# EAGLE board VgaCrystalDiode_production (EAGLE 5.10)
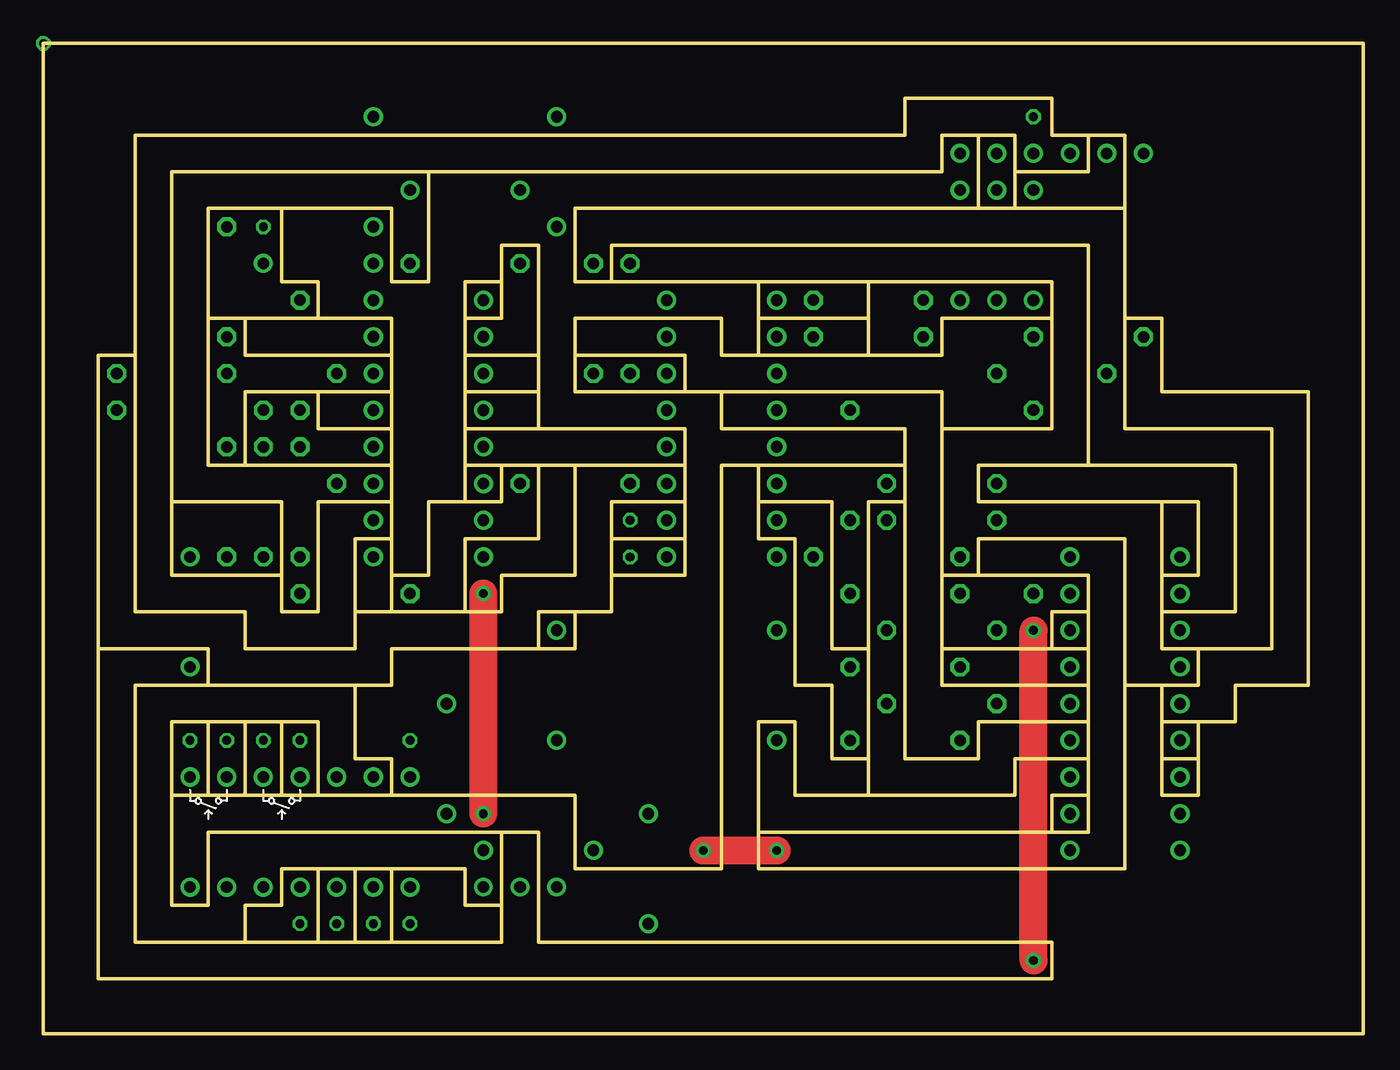
[diagram p0: board, top side]
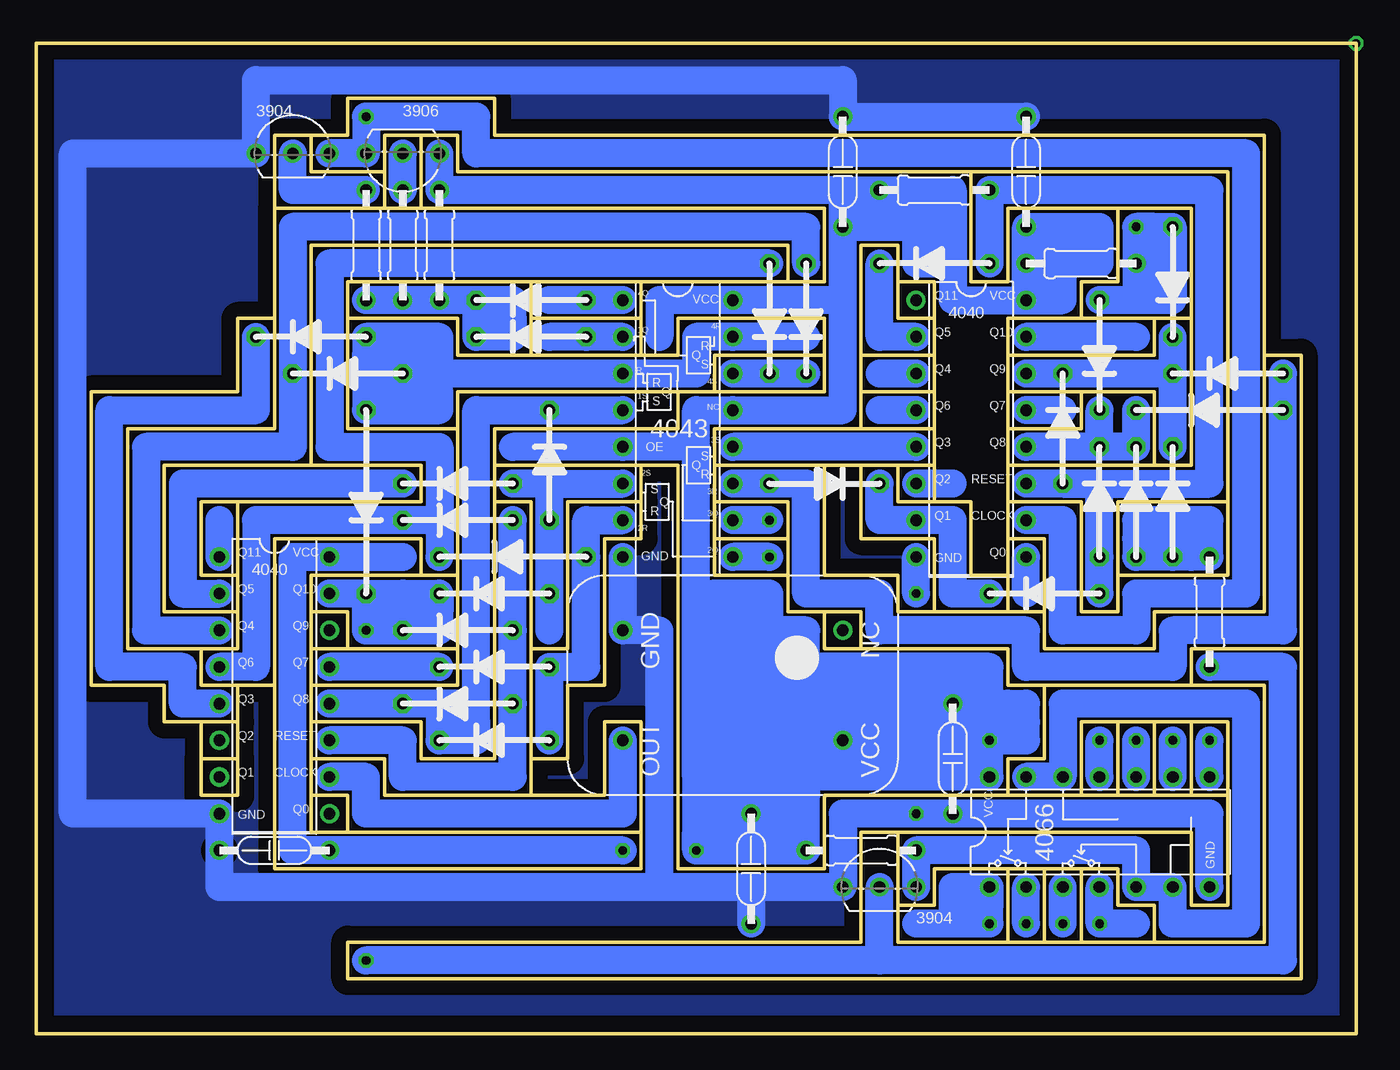
[diagram p1: board, bottom side, seen from below]

Size 91.44 x 68.58 mm. Coordinates in mm from the lower left corner, seen from the top.
Outline: 31.75,13.97 34.29,13.97 34.29,6.35 69.85,6.35 69.85,3.81 3.81,3.81 3.81,26.67
Outline: 31.75,13.97 31.75,8.89
Outline: 31.75,8.89 31.75,6.35 24.13,6.35
Outline: 24.13,6.35 21.59,6.35
Outline: 21.59,6.35 19.05,6.35
Outline: 19.05,6.35 13.97,6.35
Outline: 13.97,6.35 6.35,6.35 6.35,24.13 11.43,24.13
Outline: 11.43,24.13 11.43,26.67 3.81,26.67
Outline: 31.75,13.97 11.43,13.97 11.43,8.89 8.89,8.89 8.89,16.51
Outline: 8.89,16.51 8.89,21.59 11.43,21.59
Outline: 11.43,21.59 13.97,21.59
Outline: 13.97,21.59 16.51,21.59
Outline: 16.51,21.59 19.05,21.59 19.05,16.51
Outline: 19.05,16.51 24.13,16.51
Outline: 24.13,16.51 24.13,19.05 21.59,19.05 21.59,24.13
Outline: 21.59,24.13 11.43,24.13
Outline: 8.89,16.51 11.43,16.51
Outline: 11.43,16.51 13.97,16.51
Outline: 13.97,16.51 16.51,16.51
Outline: 16.51,16.51 19.05,16.51
Outline: 16.51,16.51 16.51,21.59
Outline: 13.97,21.59 13.97,16.51
Outline: 11.43,16.51 11.43,21.59
Outline: 13.97,6.35 13.97,8.89 16.51,8.89 16.51,11.43 19.05,11.43
Outline: 19.05,11.43 19.05,6.35
Outline: 19.05,11.43 21.59,11.43
Outline: 21.59,11.43 21.59,6.35
Outline: 21.59,11.43 24.13,11.43
Outline: 24.13,11.43 24.13,6.35
Outline: 24.13,11.43 29.21,11.43 29.21,8.89 31.75,8.89
Outline: 24.13,16.51 36.83,16.51 36.83,11.43 46.99,11.43 46.99,39.37 49.53,39.37
Outline: 49.53,39.37 59.69,39.37
Outline: 59.69,39.37 59.69,41.91 46.99,41.91 46.99,44.45
Outline: 46.99,44.45 44.45,44.45
Outline: 44.45,44.45 36.83,44.45 36.83,46.99
Outline: 36.83,46.99 44.45,46.99 44.45,44.45
Outline: 36.83,46.99 36.83,49.53 46.99,49.53 46.99,46.99 49.53,46.99
Outline: 49.53,46.99 49.53,49.53
Outline: 49.53,49.53 49.53,52.07
Outline: 49.53,52.07 39.37,52.07
Outline: 39.37,52.07 36.83,52.07 36.83,57.15 64.77,57.15
Outline: 64.77,57.15 64.77,62.23
Outline: 64.77,62.23 62.23,62.23 62.23,59.69 26.67,59.69
Outline: 26.67,59.69 26.67,52.07 24.13,52.07 24.13,57.15 16.51,57.15
Outline: 16.51,57.15 16.51,52.07 19.05,52.07 19.05,49.53
Outline: 19.05,49.53 24.13,49.53 24.13,46.99
Outline: 29.21,49.53 29.21,52.07 31.75,52.07
Outline: 31.75,52.07 31.75,54.61 34.29,54.61 34.29,46.99
Outline: 34.29,46.99 29.21,46.99
Outline: 29.21,46.99 29.21,49.53
Outline: 29.21,49.53 31.75,49.53 31.75,52.07
Outline: 29.21,46.99 29.21,44.45
Outline: 29.21,44.45 34.29,44.45
Outline: 34.29,44.45 34.29,46.99
Outline: 34.29,44.45 34.29,41.91
Outline: 34.29,41.91 29.21,41.91
Outline: 29.21,41.91 29.21,44.45
Outline: 34.29,41.91 44.45,41.91 44.45,39.37
Outline: 34.29,39.37 31.75,39.37
Outline: 31.75,39.37 29.21,39.37
Outline: 29.21,39.37 29.21,41.91
Outline: 29.21,39.37 29.21,36.83
Outline: 29.21,36.83 31.75,36.83 31.75,39.37
Outline: 34.29,39.37 34.29,34.29 29.21,34.29 29.21,29.21
Outline: 29.21,29.21 24.13,29.21
Outline: 24.13,29.21 24.13,31.75
Outline: 24.13,31.75 26.67,31.75 26.67,36.83 29.21,36.83
Outline: 24.13,29.21 21.59,29.21
Outline: 21.59,29.21 21.59,34.29 24.13,34.29
Outline: 24.13,34.29 24.13,31.75
Outline: 24.13,34.29 24.13,36.83
Outline: 24.13,36.83 19.05,36.83 19.05,29.21 16.51,29.21 16.51,31.75
Outline: 16.51,31.75 16.51,36.83 8.89,36.83
Outline: 8.89,36.83 8.89,31.75 16.51,31.75
Outline: 21.59,29.21 21.59,26.67 13.97,26.67 13.97,29.21 6.35,29.21 6.35,46.99
Outline: 6.35,46.99 3.81,46.99 3.81,26.67
Outline: 8.89,36.83 8.89,59.69 26.67,59.69
Outline: 16.51,57.15 11.43,57.15 11.43,49.53
Outline: 11.43,49.53 13.97,49.53
Outline: 13.97,49.53 19.05,49.53
Outline: 13.97,49.53 13.97,46.99 24.13,46.99
Outline: 24.13,46.99 24.13,44.45
Outline: 24.13,44.45 19.05,44.45
Outline: 19.05,44.45 13.97,44.45 13.97,39.37
Outline: 13.97,39.37 11.43,39.37 11.43,49.53
Outline: 13.97,39.37 24.13,39.37
Outline: 24.13,39.37 24.13,41.91
Outline: 24.13,41.91 19.05,41.91 19.05,44.45
Outline: 24.13,41.91 24.13,44.45
Outline: 24.13,36.83 24.13,39.37
Outline: 29.21,29.21 31.75,29.21 31.75,31.75 36.83,31.75 36.83,39.37
Outline: 34.29,26.67 24.13,26.67 24.13,24.13 21.59,24.13
Outline: 34.29,26.67 34.29,29.21 36.83,29.21
Outline: 36.83,29.21 39.37,29.21 39.37,31.75
Outline: 39.37,31.75 39.37,34.29
Outline: 39.37,34.29 39.37,36.83 44.45,36.83
Outline: 44.45,36.83 44.45,39.37
Outline: 44.45,39.37 36.83,39.37
Outline: 36.83,39.37 34.29,39.37
Outline: 49.53,13.97 49.53,11.43 74.93,11.43 74.93,24.13
Outline: 49.53,13.97 69.85,13.97
Outline: 69.85,13.97 72.39,13.97 72.39,16.51
Outline: 72.39,16.51 69.85,16.51 69.85,13.97
Outline: 72.39,16.51 72.39,19.05
Outline: 72.39,19.05 67.31,19.05 67.31,16.51 57.15,16.51
Outline: 57.15,16.51 52.07,16.51 52.07,21.59 49.53,21.59 49.53,13.97
Outline: 72.39,19.05 72.39,21.59
Outline: 72.39,21.59 64.77,21.59 64.77,19.05 59.69,19.05 59.69,36.83
Outline: 59.69,36.83 57.15,36.83 57.15,26.67
Outline: 57.15,26.67 57.15,19.05
Outline: 57.15,19.05 57.15,16.51
Outline: 57.15,19.05 54.61,19.05 54.61,24.13 52.07,24.13 52.07,34.29 49.53,34.29 49.53,36.83
Outline: 49.53,36.83 54.61,36.83 54.61,26.67 57.15,26.67
Outline: 49.53,36.83 49.53,39.37
Outline: 46.99,44.45 62.23,44.45 62.23,41.91
Outline: 62.23,41.91 62.23,31.75
Outline: 62.23,31.75 62.23,26.67
Outline: 62.23,26.67 62.23,24.13 72.39,24.13
Outline: 72.39,24.13 72.39,21.59
Outline: 72.39,24.13 72.39,26.67
Outline: 72.39,26.67 69.85,26.67
Outline: 69.85,26.67 62.23,26.67
Outline: 72.39,26.67 72.39,29.21
Outline: 72.39,29.21 69.85,29.21 69.85,26.67
Outline: 72.39,29.21 72.39,31.75 64.77,31.75
Outline: 64.77,31.75 62.23,31.75
Outline: 64.77,31.75 64.77,34.29 74.93,34.29 74.93,24.13
Outline: 80.01,19.05 80.01,16.51 77.47,16.51 77.47,19.05
Outline: 80.01,19.05 77.47,19.05
Outline: 77.47,19.05 77.47,21.59
Outline: 77.47,21.59 80.01,21.59
Outline: 80.01,21.59 80.01,19.05
Outline: 77.47,21.59 77.47,24.13
Outline: 77.47,24.13 80.01,24.13 80.01,26.67
Outline: 80.01,26.67 85.09,26.67 85.09,41.91 74.93,41.91 74.93,49.53
Outline: 74.93,49.53 77.47,49.53 77.47,44.45 87.63,44.45 87.63,24.13 82.55,24.13 82.55,21.59 80.01,21.59
Outline: 80.01,26.67 77.47,26.67 77.47,29.21
Outline: 77.47,29.21 82.55,29.21 82.55,39.37 72.39,39.37
Outline: 72.39,39.37 72.39,54.61 39.37,54.61 39.37,52.07
Outline: 49.53,52.07 57.15,52.07
Outline: 57.15,52.07 57.15,49.53
Outline: 57.15,49.53 49.53,49.53
Outline: 57.15,49.53 57.15,46.99
Outline: 57.15,46.99 49.53,46.99
Outline: 57.15,46.99 62.23,46.99 62.23,49.53 69.85,49.53
Outline: 69.85,49.53 69.85,52.07 57.15,52.07
Outline: 62.23,41.91 69.85,41.91 69.85,49.53
Outline: 77.47,29.21 77.47,31.75
Outline: 77.47,31.75 77.47,36.83
Outline: 77.47,36.83 80.01,36.83 80.01,31.75 77.47,31.75
Outline: 77.47,36.83 64.77,36.83 64.77,39.37 72.39,39.37
Outline: 74.93,49.53 74.93,57.15
Outline: 74.93,57.15 67.31,57.15
Outline: 67.31,57.15 64.77,57.15
Outline: 64.77,62.23 67.31,62.23 67.31,59.69
Outline: 67.31,59.69 67.31,57.15
Outline: 67.31,59.69 72.39,59.69 72.39,62.23
Outline: 72.39,62.23 74.93,62.23 74.93,57.15
Outline: 72.39,62.23 69.85,62.23 69.85,64.77 59.69,64.77 59.69,62.23 6.35,62.23 6.35,46.99
Outline: 34.29,26.67 36.83,26.67 36.83,29.21
Outline: 77.47,24.13 74.93,24.13
Outline: 39.37,31.75 44.45,31.75 44.45,34.29
Outline: 39.37,34.29 44.45,34.29
Outline: 44.45,34.29 44.45,36.83
Outline: 59.69,36.83 59.69,39.37
Outline: 0,0 0,68.58 91.44,68.58 91.44,0 0,0
Copper layers (1*16): Top 0.035mm / dielectric 1.5mm / Bottom 0.035mm
Design rules "default": minimum track width 10mil, minimum drill 24mil, track to track 8mil, track to pad 8mil, pad to pad 8mil, via to via 8mil, smd to smd 8mil, copper to edge 40mil, drill to drill 8mil, minimum pad ring 10mil, minimum via ring 8mil, stop-mask expansion 4mil, vias tented up to drill 0mil, thermal gap 10mil

## Footprints (pad centres in the part's own frame; a part is rotated, then mirrored left to right if it is on the bottom)
4043-SR-LATCH = drill 0.813 round: 1!R -3.81,1.27; 1!S -3.81,3.81; 1Q 3.81,1.27; 2!R -3.81,-3.81; 2!S -3.81,-6.35; 2Q 3.81,-8.89; 3!R 3.81,-1.27; 3!S 3.81,-3.81; 3Q 3.81,-6.35; 4!R 3.81,3.81; 4!S 3.81,6.35; 4Q -3.81,8.89; GND -3.81,-8.89; NC -3.81,6.35; OE -3.81,-1.27; VCC 3.81,8.89
RESISTOR = drill 0.813 round: IN1 -3.81,0; IN2 3.81,0
DIODE = drill 0.8 octagon: P$1 -3.81,0; P$2 3.81,0
DIODE-L2 = drill 0.8 octagon: P$1 -5.08,0; P$2 5.08,0
404-BIN-COUNT = drill 0.813 round: CLOCK 3.81,-7.62; GND -3.81,-10.16; Q0 3.81,-10.16; Q1 -3.81,-7.62; Q2 -3.81,-5.08; Q3 -3.81,-2.54; Q4 -3.81,2.54; Q5 -3.81,5.08; Q6 -3.81,0; Q7 3.81,0; Q8 3.81,-2.54; Q9 3.81,2.54; Q10 3.81,5.08; Q11 -3.81,7.62; RESET 3.81,-5.08; VCC 3.81,7.62
711A-XTAL = drill 0.813 round: GND -3.81,-8.89; NC -3.81,6.35; OUT 3.81,-8.89; VCC 3.81,6.35
4066-QUAD-SW = drill 0.813 round: A1 -3.81,7.62; A2 -3.81,2.54; A3 3.81,-5.08; A4 3.81,0; B1 -3.81,5.08; B2 -3.81,0; B3 3.81,-7.62; B4 3.81,-2.54; C1 3.81,5.08; C2 -3.81,-2.54; C3 -3.81,-5.08; C4 3.81,2.54; GND -3.81,-7.62; VCC 3.81,7.62
TRANSISTOR = drill 0.8 round: P$1 0,0; P$2 2.54,0; P$3 -2.54,0
DIODE-L3 = drill 0.8 octagon: P$1 -6.35,0; P$2 6.35,0
CAPACITOR = drill 0.813 round: IN1 -2.54,0; IN2 5.08,0

## Placement (x,y rotation side)
E$1  [4043-SR-LATCH]  46.99,41.91 0 bottom
E$2  2K  [RESISTOR]  29.21,58.42 180 bottom
E$3  [DIODE]  62.23,22.86 180 bottom
E$4  [DIODE-L2]  10.16,43.18 180 bottom
E$5  [404-BIN-COUNT]  74.93,25.4 0 bottom
E$6  [711A-XTAL]  41.91,24.13 270 bottom
E$7  [4066-QUAD-SW]  17.78,13.97 90 bottom
E$8  [DIODE]  12.7,36.83 90 bottom
E$9  [DIODE]  62.23,27.94 180 bottom
E$10  2K  [RESISTOR]  10.16,29.21 270 bottom
E$11  [DIODE]  62.23,35.56 180 bottom
E$12  [DIODE]  59.69,20.32 180 bottom
E$13  [DIODE]  59.69,25.4 180 bottom
E$14  [DIODE]  57.15,48.26 180 bottom
E$15  [DIODE]  40.64,49.53 270 bottom
E$16  [TRANSISTOR]  33.02,10.16 0 bottom
E$17  [DIODE]  55.88,39.37 90 bottom
E$18  [DIODE]  62.23,38.1 180 bottom
E$19  [DIODE]  59.69,30.48 180 bottom
E$20  [DIODE]  38.1,49.53 270 bottom
E$21  [DIODE-L2]  58.42,33.02 180 bottom
E$22  [DIODE]  57.15,50.8 180 bottom
E$23  2K  [RESISTOR]  34.29,12.7 180 bottom
E$24  [DIODE-L3]  68.58,36.83 270 bottom
E$25  [DIODE]  69.85,45.72 180 bottom
E$26  [DIODE]  72.39,48.26 180 bottom
E$27  [404-BIN-COUNT]  26.67,43.18 0 bottom
E$28  [DIODE]  17.78,36.83 90 bottom
E$29  [DIODE]  20.32,41.91 90 bottom
E$30  [DIODE]  21.59,30.48 180 bottom
E$31  [DIODE]  29.21,53.34 180 bottom
E$32  [DIODE]  36.83,38.1 0 bottom
E$33  [DIODE]  17.78,46.99 270 bottom
E$34  [DIODE]  12.7,52.07 270 bottom
E$35  2K  [RESISTOR]  68.58,54.61 90 bottom
E$36  2K  [RESISTOR]  66.04,54.61 90 bottom
E$37  10K  [RESISTOR]  63.5,54.61 90 bottom
E$38  [TRANSISTOR]  66.04,60.96 180 bottom
E$39  [TRANSISTOR]  73.66,60.96 0 bottom
E$40  [DIODE]  15.24,36.83 90 bottom
E$41  2K  [RESISTOR]  19.05,53.34 180 bottom
E$42  1UF  [CAPACITOR]  27.94,17.78 90 bottom
E$43  1UF  [CAPACITOR]  41.91,10.16 90 bottom
E$44  1UF  [CAPACITOR]  22.86,58.42 90 bottom
E$45  1UF  [CAPACITOR]  76.2,12.7 0 bottom
E$46  1UF  [CAPACITOR]  35.56,58.42 90 bottom
E$47  [DIODE]  8.89,45.72 180 bottom

## Library data of the parts
E$1-E$47 = RussellLibrary

## Nets
GND: E$1.GND E$5.GND E$6.GND E$7.GND E$16.P$3 E$27.GND E$39.P$3 E$43.IN1 E$44.IN2 E$46.IN2
S$1: E$5.CLOCK E$6.OUT
S$2: E$5.Q11
S$3: E$3.P$1 E$5.RESET E$9.P$1 E$11.P$1
S$4: E$1.1!R E$3.P$2 E$5.Q8 E$12.P$2
S$5: E$8.P$1 E$10.IN1 E$40.P$1
S$6: E$5.Q6 E$11.P$2 E$15.P$1 E$21.P$2
S$7: E$5.Q7 E$13.P$2
S$8: E$1.2!S E$12.P$1 E$13.P$1 E$21.P$1
S$9: E$1.2!R E$17.P$1 E$18.P$1 E$19.P$1
S$10: E$5.Q5 E$18.P$2
S$11: E$1.1!S E$1.4!S E$24.P$1 E$26.P$1
S$12: E$1.4!R E$15.P$2
S$13: E$5.Q4 E$20.P$1
S$14: E$1.4Q E$22.P$1
S$15: E$1.NC E$14.P$1
S$16: E$27.CLOCK E$38.P$2 E$39.P$2
S$17: E$5.Q3 E$26.P$2
S$18: E$1.3!S E$32.P$1
S$19: E$27.Q5 E$31.P$2
S$20: E$8.P$2 E$27.Q9 E$29.P$2 E$34.P$2
S$21: E$27.Q8 E$28.P$2 E$33.P$2 E$40.P$2
S$22: E$1.3!R
S$23: E$27.RESET E$28.P$1 E$29.P$1 E$30.P$1 E$31.P$1
S$24: E$35.IN2 E$39.P$1
S$26: E$14.P$2 E$22.P$2 E$35.IN1 E$36.IN1 E$37.IN1
S$27: E$36.IN2 E$38.P$1
S$28: E$1.2Q
S$29: E$1.1Q E$1.OE E$1.VCC E$5.VCC E$6.VCC E$7.VCC E$23.IN2 E$27.VCC E$37.IN2 E$38.P$3 E$41.IN2 E$42.IN2 E$43.IN2 E$44.IN1
S$30: E$1.3Q
S$31: E$27.Q10
S$32: E$5.Q10 E$9.P$2 E$10.IN2 E$16.P$1
S$33: E$7.C1 E$7.C2 E$7.C3 E$7.C4 E$16.P$2 E$23.IN1
S$34: E$27.Q7
S$35: E$33.P$1 E$34.P$1 E$41.IN1
S$36: E$27.Q0
S$37: E$27.Q2
S$38: E$27.Q4
S$39: E$27.Q6
S$40: E$7.A1
S$41: E$7.A4
S$42: E$7.B4
S$43: E$7.A3
S$44: E$7.B3
S$45: E$7.B1
S$46: E$7.A2
S$47: E$7.B2
S$49: E$27.Q1 E$30.P$2 E$32.P$2

## Tracks (layer width: path | path; a pad name or v marks a point on that pad's centre or on a via)
GND  (via drill 0.6)
  Top 1.93: v30.48,15.24 v30.48,30.48
  Bottom 1.93: 48.26,10.16 48.26,27.94 E$6.GND E$1.GND | 41.91,10.16 48.26,10.16 | 41.91,10.16 E$16.P$3 35.56,15.24 v30.48,15.24 10.16,15.24 E$7.GND | 48.26,10.16 78.74,10.16 E$5.GND 88.9,15.24 88.9,60.96 E$39.P$3 76.2,66.04 35.56,66.04 E$46.IN2 E$44.IN2 | v30.48,30.48 E$27.GND | 41.91,10.16 E$43.IN1
  pour Bottom (isolate 0.61, no thermals): 90.17,1.27 90.17,68.58 0,68.58 0,1.27
S$1
  Bottom 1.93: E$5.CLOCK 68.58,17.78 68.58,15.24 50.8,15.24 E$6.OUT
S$2
  Bottom 1.93: E$5.Q11 78.74,35.56
S$3
  Bottom 1.93: E$5.RESET 66.04,20.32 66.04,17.78 58.42,17.78 E$3.P$1 E$9.P$1 E$11.P$1
S$4
  Bottom 1.93: E$5.Q8 E$3.P$2 63.5,22.86 | 60.96,22.86 63.5,22.86 | 63.5,22.86 E$12.P$2 60.96,20.32 60.96,21.59 | E$1.1!R 60.96,43.18 60.96,22.86 | 60.96,21.59 60.96,22.86 | 62.23,21.59 60.96,21.59
S$5
  Bottom 1.93: 11.43,33.02 E$8.P$1 E$40.P$1 15.24,34.29 | 11.43,33.02 E$10.IN1 10.16,35.56 15.24,35.56 15.24,34.29 | 15.24,34.29 11.43,34.29 11.43,33.02
S$6
  Bottom 1.93: E$5.Q6 76.2,25.4 76.2,35.56 E$11.P$2 63.5,35.56 | 63.5,35.56 63.5,40.64 71.12,40.64 71.12,53.34 E$15.P$1 | 63.5,35.56 E$21.P$2
S$7
  Bottom 1.93: E$13.P$2 E$5.Q7
S$8
  Bottom 1.93: E$12.P$1 E$13.P$1 53.34,25.4 E$21.P$1 53.34,35.56 E$1.2!S
S$9
  Bottom 1.93: 55.88,38.1 E$1.2!R | 55.88,38.1 E$18.P$1 | 55.88,38.1 E$17.P$1 E$19.P$1 55.88,27.94
S$10
  Bottom 1.93: E$5.Q5 81.28,30.48 81.28,38.1 E$18.P$2
S$11
  Bottom 1.93: 63.5,45.72 68.58,45.72 | 63.5,45.72 E$1.1!S 45.72,45.72 45.72,48.26 E$1.4!S 38.1,48.26 | 68.58,45.72 68.58,46.99 | 68.58,45.72 E$24.P$1 63.5,43.18 63.5,44.45 67.31,44.45 | 63.5,45.72 63.5,48.26 E$26.P$1 68.58,46.99 | 68.58,46.99 64.77,46.99
S$12
  Bottom 1.93: 38.1,45.72 E$15.P$2 E$1.4!R
S$13
  Bottom 1.93: E$5.Q4 83.82,27.94 83.82,40.64 73.66,40.64 73.66,55.88 38.1,55.88 E$20.P$1
S$14
  Bottom 1.93: E$1.4Q E$22.P$1 55.88,50.8
S$15
  Bottom 1.93: E$1.NC E$14.P$1 55.88,48.26
S$16  (via drill 0.6)
  Bottom 1.93: E$39.P$2 E$38.P$2 v68.58,63.5 60.96,63.5 60.96,60.96 7.62,60.96 7.62,30.48 15.24,30.48 15.24,27.94 20.32,27.94 20.32,35.56 E$27.CLOCK
S$17
  Bottom 1.93: E$5.Q3 81.28,22.86 81.28,25.4 86.36,25.4 86.36,43.18 76.2,43.18 E$26.P$2
S$18
  Bottom 1.93: 5.08,45.72 5.08,27.94 12.7,27.94 12.7,25.4 22.86,25.4 22.86,27.94 33.02,27.94 33.02,30.48 38.1,30.48 38.1,38.1 E$32.P$1 E$1.3!S
S$19
  Bottom 1.93: E$31.P$2 33.02,48.26 E$27.Q5
S$20
  Bottom 1.93: E$8.P$2 12.7,45.72 | 12.7,45.72 E$34.P$2 | 12.7,45.72 E$29.P$2 E$27.Q9
S$21
  Bottom 1.93: E$28.P$2 E$27.Q8 | 15.24,43.18 E$40.P$2 E$28.P$2 | E$28.P$2 E$33.P$2
S$22
  Bottom 1.93: 30.48,40.64 E$1.3!R
S$23
  Bottom 1.93: E$29.P$1 10.16,38.1 10.16,58.42 25.4,58.42 E$31.P$1 | E$29.P$1 17.78,38.1 E$28.P$1 E$30.P$1 | E$29.P$1 E$27.RESET
S$24
  Bottom 1.93: E$35.IN2 73.66,58.42 E$39.P$1
S$25  (via drill 0.6)
  other vias: 0,68.58
S$26
  Bottom 1.93: E$35.IN1 E$36.IN1 E$37.IN1 E$22.P$2 | E$22.P$2 E$14.P$2 58.42,48.26 58.42,49.53 | E$22.P$2 58.42,50.8 58.42,49.53 | 59.69,49.53 58.42,49.53
S$27
  Bottom 1.93: E$36.IN2 E$38.P$1
S$28  (via drill 0.6)
  Bottom 1.93: v40.64,33.02 E$1.2Q
S$29  (via drill 0.6)
  Top 1.93: v45.72,12.7 v50.8,12.7
  Bottom 1.93: E$27.VCC 27.94,50.8 27.94,53.34 | 27.94,53.34 27.94,58.42 35.56,58.42 | 35.56,50.8 35.56,55.88 | 35.56,57.15 35.56,58.42 | 35.56,50.8 E$1.VCC 48.26,50.8 48.26,48.26 | 35.56,50.8 35.56,43.18 E$1.1Q 45.72,43.18 45.72,40.64 | 45.72,40.64 E$1.OE 58.42,40.64 | 38.1,20.32 45.72,20.32 | 38.1,20.32 E$6.VCC 27.94,20.32 | 45.72,20.32 45.72,40.64 | E$38.P$3 E$37.IN2 35.56,58.42 | 45.72,17.78 E$43.IN2 45.72,13.97 | 45.72,19.05 45.72,20.32 | v50.8,12.7 73.66,12.7 73.66,33.02 E$5.VCC 66.04,33.02 | 38.1,20.32 38.1,16.51 | 38.1,16.51 E$23.IN2 v45.72,12.7 | E$7.VCC 27.94,20.32 | E$27.VCC E$41.IN2 E$44.IN1 | 27.94,20.32 E$42.IN2 | 29.21,53.34 27.94,53.34 | 29.21,53.34 30.48,53.34 30.48,55.88 35.56,55.88 | 35.56,55.88 35.56,57.15 | 35.56,57.15 29.21,57.15 29.21,53.34 | E$27.VCC 20.32,50.8 20.32,53.34 17.78,53.34 17.78,55.88 E$44.IN1 | E$44.IN1 22.86,54.61 19.05,54.61 19.05,53.34 21.59,53.34 21.59,52.07 | E$7.VCC v25.4,20.32 | v25.4,20.32 25.4,22.86 | 25.4,22.86 24.13,22.86 | 25.4,22.86 25.4,25.4 38.1,25.4 38.1,27.94 40.64,27.94 40.64,30.48 43.18,30.48 | 43.18,30.48 43.18,22.86 41.91,22.86 | 43.18,30.48 44.45,30.48 44.45,21.59 41.91,21.59 41.91,26.67 | 41.91,26.67 41.91,29.21 | 41.91,26.67 40.64,26.67 40.64,21.59 39.37,21.59 39.37,24.13 | 39.37,24.13 39.37,26.67 | 39.37,24.13 26.67,24.13 26.67,22.86 38.1,22.86 38.1,21.59 26.67,21.59 | E$7.VCC 45.72,17.78 | 45.72,17.78 45.72,19.05 | 45.72,19.05 27.94,19.05 27.94,20.32 | 27.94,20.32 26.67,20.32 | v25.4,20.32 22.86,20.32 22.86,21.59 | 22.86,21.59 24.13,21.59 24.13,22.86 | 24.13,22.86 22.86,22.86 22.86,21.59 | v45.72,12.7 45.72,13.97 | 45.72,13.97 44.45,13.97 | 39.37,15.24 39.37,13.97 44.45,13.97
  Bottom 1.93: 44.45,13.97 44.45,15.24 39.37,15.24 | 39.37,16.51 39.37,15.24 | 38.1,16.51 39.37,16.51 | 39.37,16.51 44.45,16.51 | 45.72,17.78 v45.72,12.7
S$30  (via drill 0.6)
  Bottom 1.93: v40.64,35.56 E$1.3Q
S$31
  Bottom 1.93: 15.24,48.26 E$27.Q10
S$32  (via drill 0.6)
  Top 1.93: v68.58,5.08 v68.58,27.94
  Bottom 1.93: E$10.IN2 5.08,25.4 5.08,5.08 33.02,5.08 | 68.58,30.48 E$5.Q10 | 68.58,30.48 66.04,30.48 | 66.04,30.48 63.5,30.48 63.5,29.21 | E$9.P$2 66.04,30.48 | 68.58,30.48 v68.58,27.94 67.31,27.94 | 33.02,5.08 v68.58,5.08 | 33.02,5.08 E$16.P$1 | E$9.P$2 63.5,27.94 63.5,29.21 | 63.5,29.21 64.77,29.21 | 67.31,27.94 E$9.P$2 | 67.31,27.94 67.31,29.21
S$33
  Bottom 1.93: E$16.P$2 E$23.IN1 15.24,12.7 E$7.C2 E$7.C3 12.7,7.62 7.62,7.62 7.62,22.86 20.32,22.86 E$7.C4 E$7.C1
S$34
  Bottom 1.93: 20.32,43.18 E$27.Q7
S$35  (via drill 0.6)
  Bottom 1.93: 15.24,50.8 E$33.P$1 | 15.24,50.8 E$41.IN1 v15.24,55.88 13.97,55.88 | 15.24,50.8 12.7,50.8 E$34.P$1 13.97,55.88 | 13.97,52.07 13.97,55.88
S$36
  Bottom 1.93: 22.86,30.48 E$27.Q0
S$37
  Bottom 1.93: 27.94,38.1 E$27.Q2
S$38
  Bottom 1.93: E$27.Q4 33.02,45.72
S$39
  Bottom 1.93: E$27.Q6 33.02,43.18
S$40  (via drill 0.6)
  Bottom 1.93: E$7.A1 v25.4,7.62 27.94,7.62 | 27.94,7.62 30.48,7.62 | 27.94,7.62 27.94,10.16 E$7.A1 | E$7.A1 25.4,8.89 26.67,8.89
S$41  (via drill 0.6)
  Bottom 1.93: E$7.A4 v17.78,20.32
S$42  (via drill 0.6)
  Bottom 1.93: E$7.B4 v15.24,20.32
S$43  (via drill 0.6)
  Bottom 1.93: E$7.A3 v12.7,20.32
S$44  (via drill 0.6)
  Bottom 1.93: E$7.B3 v10.16,20.32
S$45  (via drill 0.6)
  Bottom 1.93: v22.86,7.62 E$7.B1
S$46  (via drill 0.6)
  Bottom 1.93: v20.32,7.62 E$7.A2
S$47  (via drill 0.6)
  Bottom 1.93: v17.78,7.62 E$7.B2
S$48
  Bottom 1.93: 15.24,7.62 17.78,7.62
S$49
  Bottom 1.93: E$32.P$2 33.02,35.56 E$27.Q1 27.94,35.56 27.94,30.48 E$30.P$2

## Text on the board
Unrouted: HSYNC | VST | VSYNC | HST
bPlace: 3906 | 3904 | 3904